# EAGLE board hvreg_feedback_2PS_ACDC (EAGLE 7.2.0)
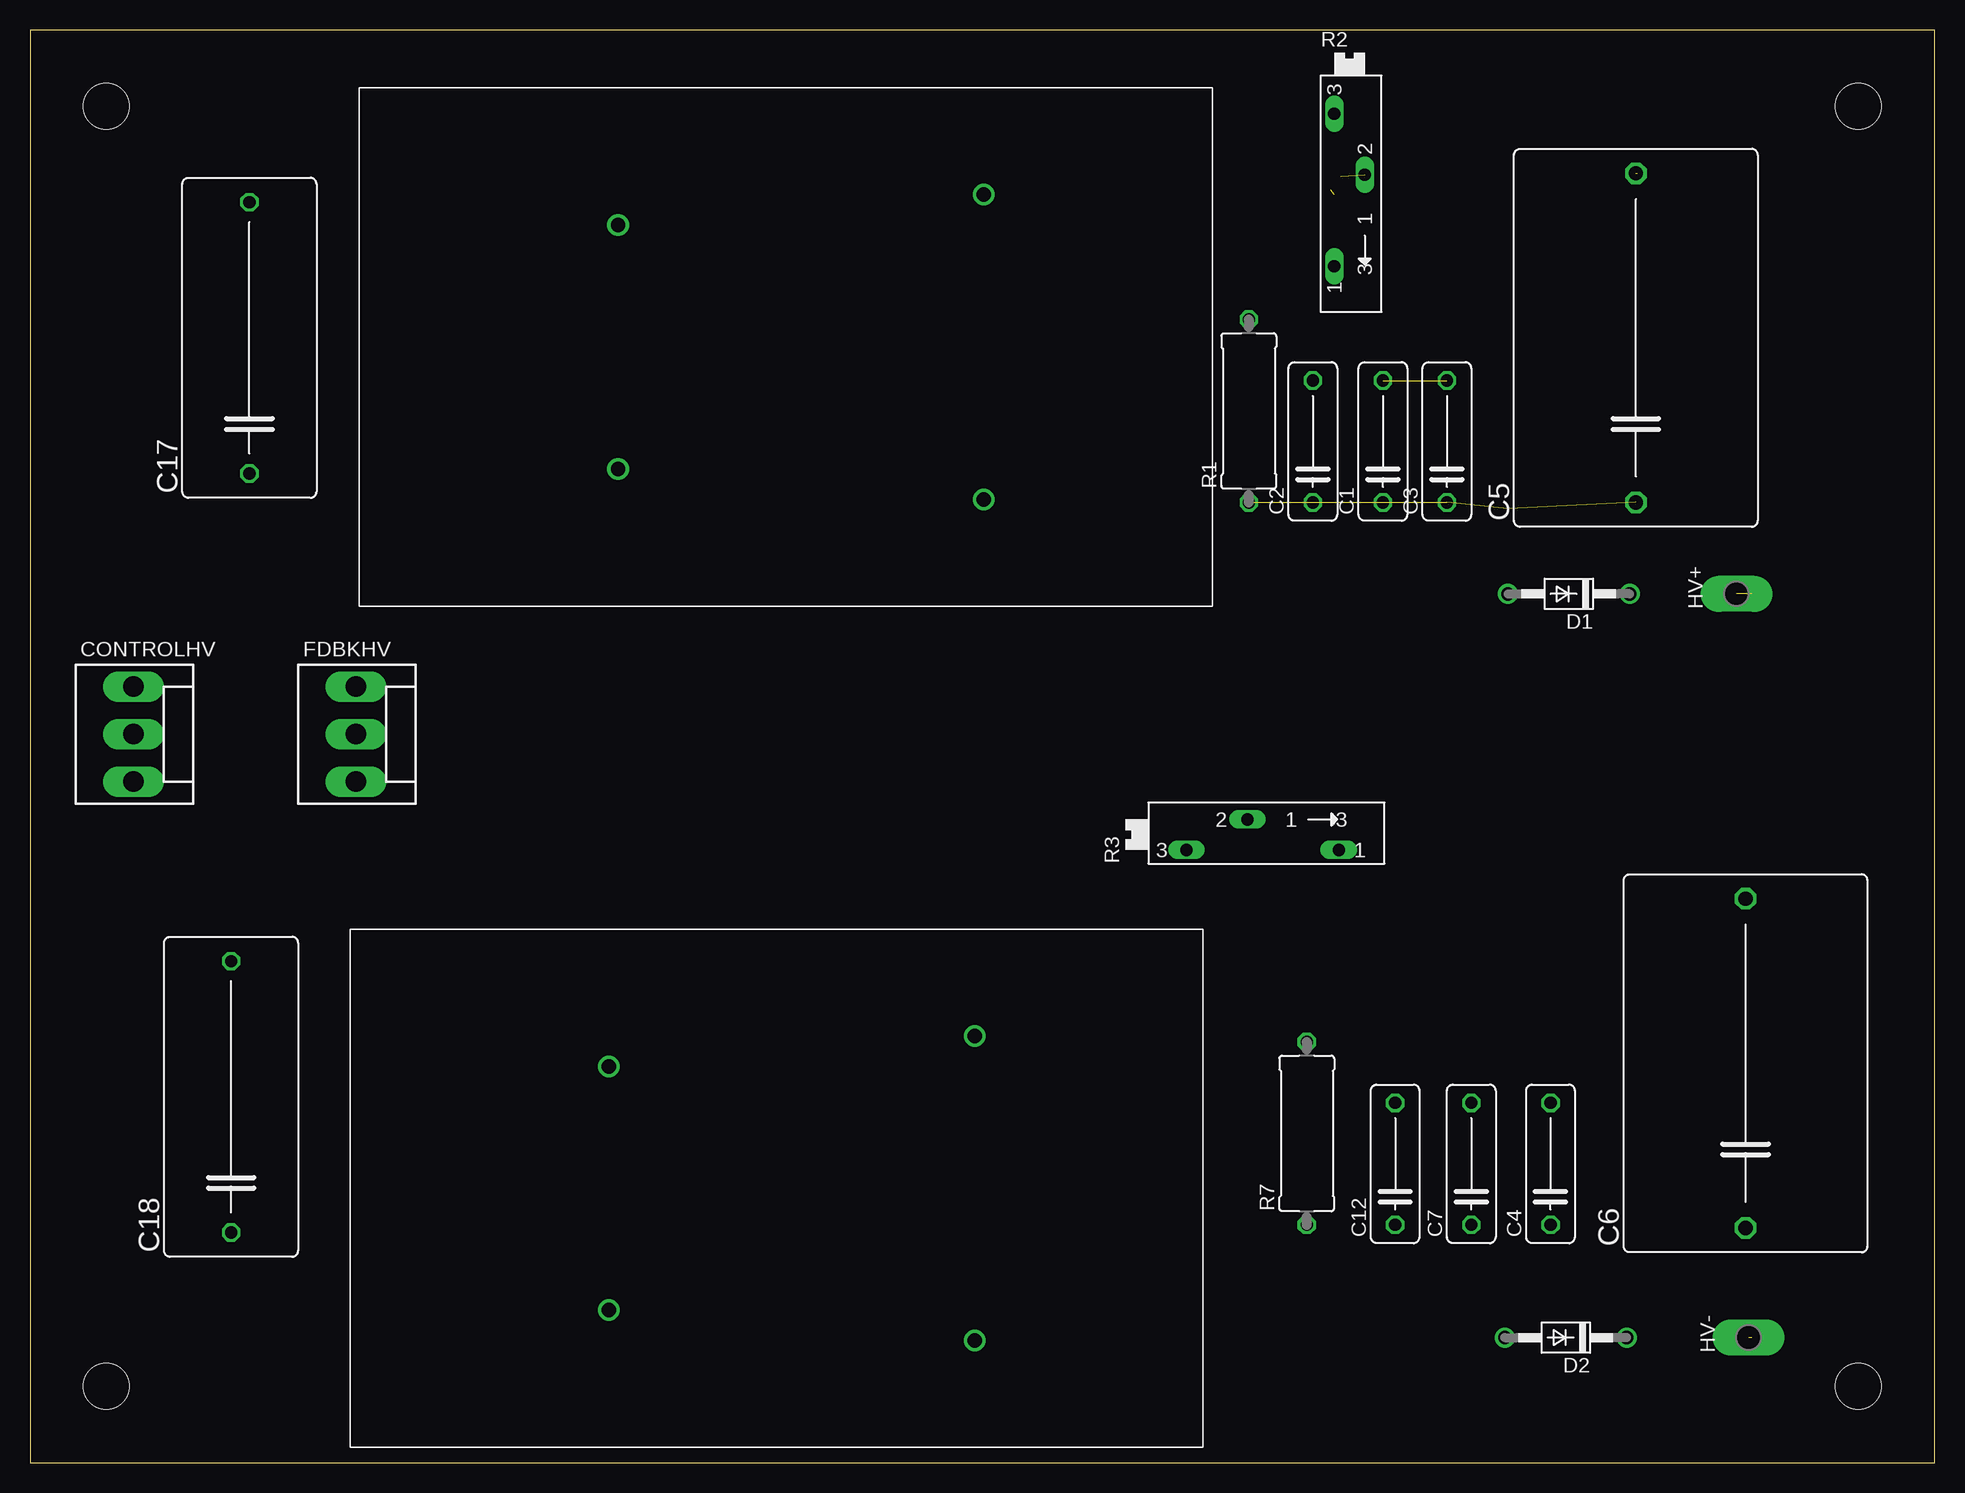
[diagram p0: board, top side]
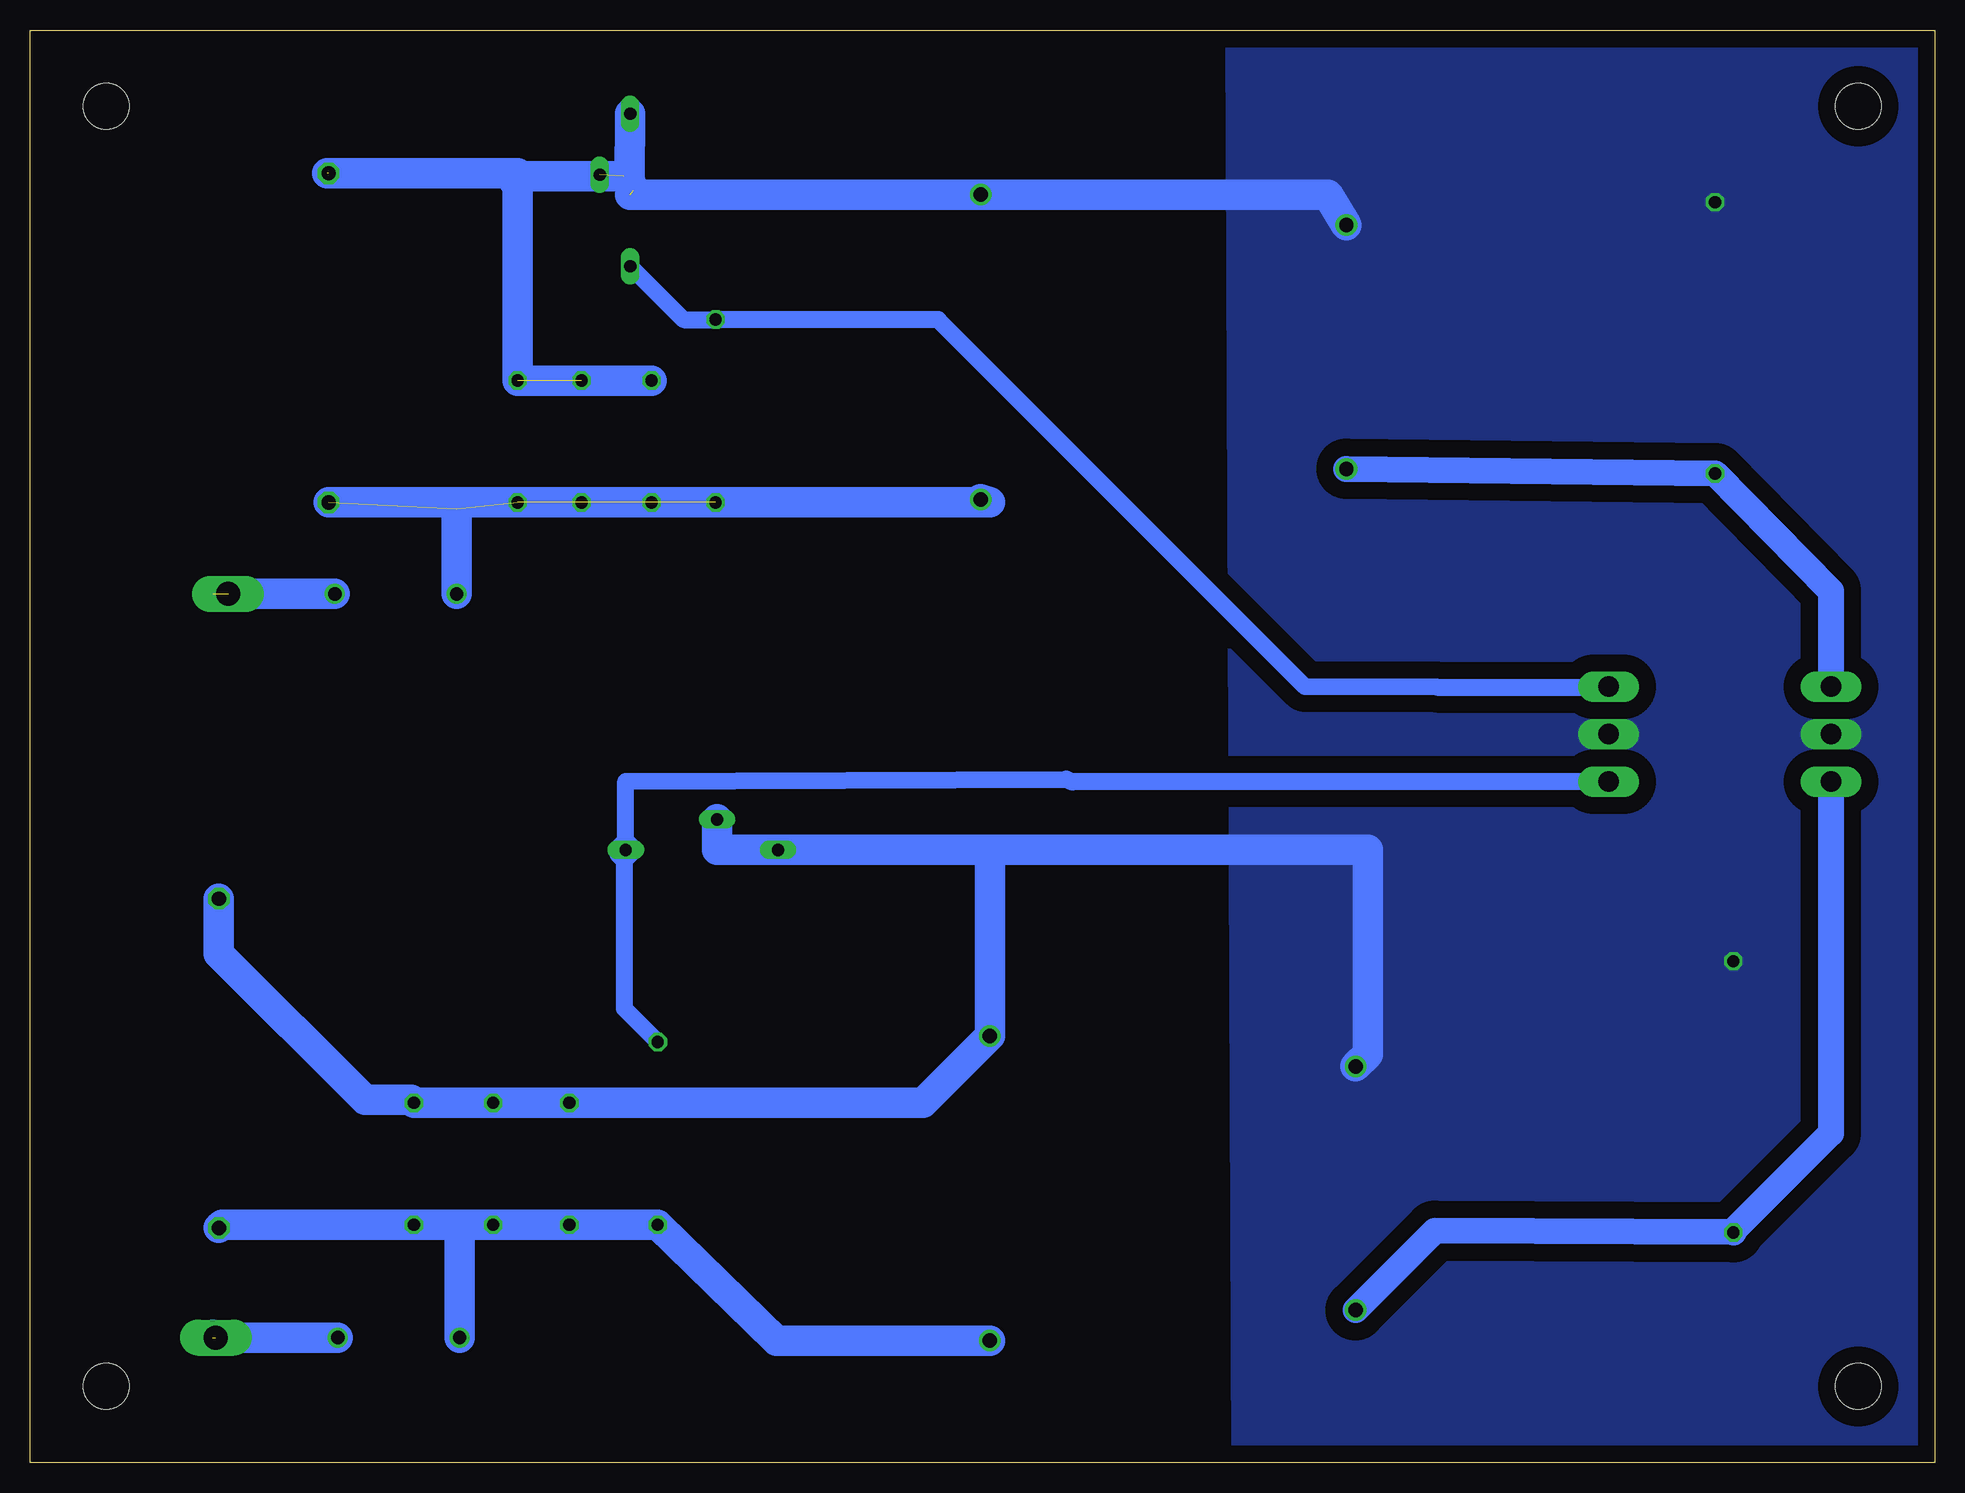
[diagram p1: board, bottom side, seen from below]

Size 158.75 x 119.38 mm. Coordinates in mm from the lower left corner, seen from the top.
Outline: 0,0 158.75,0 158.75,119.38 0,119.38 0,0
Copper layers (1*16): Top 0.035mm / dielectric 1.5mm / Bottom 0.035mm
Design rules "default": minimum track width 10mil, minimum drill 24mil, track to track 8mil, track to pad 8mil, pad to pad 8mil, via to via 8mil, smd to smd 8mil, copper to edge 40mil, drill to drill 8mil, minimum pad ring 10mil, minimum via ring 8mil, stop-mask expansion 4mil, vias tented up to drill 0mil, thermal gap 10mil
Holes 3.8 mm at 152.4,6.35 152.4,113.03 6.35,6.35 6.35,113.03

## Footprints (pad centres in the part's own frame; a part is rotated, then mirrored left to right if it is on the bottom)
C102-043X133 = drill 1.016 octagon: 1 -5.08,0; 2 5.08,0
C275-205X316 = drill 1.194 octagon: 1 -13.716,0; 2 13.716,0
C225-113X268 = drill 1.016 octagon: 1 -11.303,0; 2 11.303,0
KK-156-3 = drill 1.7 pad 2.184 long: 1 -3.96,0; 2 0,0; 3 3.96,0
DO41-10 = drill 1.118: A 5.08,0; C -5.08,0
P1-20Y = drill 2.007 pad 2.54 long: TP 0,0
P0613/15 = drill 1.016 octagon: 1 -7.62,0; 2 7.62,0
SP19L = drill 1.016 long: A 5.715,-1.27; E -6.985,-1.27; S -1.905,1.27
EMCO-F = drill 1.2: P$1 0,0; P$2 0,20.32; P$3 30.48,-2.54; P$4 30.48,22.86

## Placement (x,y rotation side)
C1  1n  [C102-043X133]  112.78,85.09 90 top
C2  10p  [C102-043X133]  106.93,85.09 90 top
C3  .01u  [C102-043X133]  118.11,85.09 90 top
C4  1n  [C102-043X133]  126.75,24.89 90 top
C5  1u  [C275-205X316]  133.86,93.73 90 top
C6  1u  [C275-205X316]  143,33.27 90 top
C7  10p  [C102-043X133]  120.14,24.89 90 top
C12  .01u  [C102-043X133]  113.79,24.89 90 top
C17  .1u  [C225-113X268]  18.29,93.73 90 top
C18  .1u  [C225-113X268]  16.76,30.48 90 top
CONTROLHV  [KK-156-3]  8.64,60.71 270 top
D1  1N4004  [DO41-10]  128.27,72.39 180 top
D2  1N4004  [DO41-10]  128.02,10.41 180 top
FDBKHV  [KK-156-3]  27.18,60.71 270 top
HV+  TPPAD1-20Y  [P1-20Y]  142.24,72.39 90 top
HV-  TPPAD1-20Y  [P1-20Y]  143.26,10.41 90 top
R1  2M  [P0613/15]  101.6,87.63 90 top
R2  [SP19L]  109.98,105.41 270 top
R3  [SP19L]  103.38,52.32 0 top
R7  2M  [P0613/15]  106.43,27.43 90 top
U$1  EMCO-F104PIN  [EMCO-F]  49.02,82.8 0 top
U$2  EMCO-F104PIN  [EMCO-F]  48.26,12.7 0 top

## Library data of the parts
C1-C7 C12 C17 C18 = rcl
CONTROLHV FDBKHV = con-molex; OC_FARNELL: unknown; OC_NEWARK: unknown
D1 D2 = diode
HV+ HV- = testpad
R1 R7 = resistor
R2 R3 = pot
U$1 U$2 = dc-dc-converter

## Nets
GND: C1.2 C2.2 C3.2 C4.2 C5.2 C6.2 C7.2 C12.2 C17.2 C18.2 CONTROLHV.2 FDBKHV.2 R2.E R2.S R3.E R3.S U$1.P$2 U$1.P$4 U$2.P$2 U$2.P$4
N$1: C1.1 C2.1 C3.1 C5.1 D1.A R1.1 U$1.P$3
N$2: C4.1 C6.1 C7.1 C12.1 D2.A R7.1 U$2.P$3
N$3: FDBKHV.1 R1.2 R2.A
N$4: D2.C HV-.TP
N$6: D1.C HV+.TP
N$8: FDBKHV.3 R3.A R7.2
N$13: C17.1 CONTROLHV.1 U$1.P$1
N$15: C18.1 CONTROLHV.3 U$2.P$1

## Tracks (layer width: path | path; a pad name or v marks a point on that pad's centre or on a via)
GND  (4 unrouted)
  Bottom 2.54: U$1.P$2 50.55,105.66 U$1.P$4 108.71,105.66 | 118.11,106.93 C3.2 C2.2 | 133.98,107.44 118.11,107.44 118.11,107.19 | 108.46,106.05 108.76,106.95 | 108.76,106.95 R2.E | 118.11,107.19 118.11,106.93 | 118.11,106.93 118.36,106.68 118.36,106.93 118.11,107.19 | 118.11,107.19 109.29,107.19 108.76,106.95 | R3.S 101.47,51.05 R3.E 78.74,51.05 | 78.74,51.05 47.24,51.05 47.24,34.04 U$2.P$2 | 78.74,51.05 U$2.P$4 84.33,29.97 C12.2 C7.2 C4.2 127,30.23 130.81,30.23 143,42.42 C6.2
  pour Bottom (isolate 1.422, no thermals): 0,119.38 58.93,119.13 58.42,0.25 0.25,0
N$1  (5 unrouted)
  Bottom 2.54: C5.1 78.74,80.01 U$1.P$3 | D1.A 123.19,79.5
N$2
  Bottom 2.54: U$2.P$3 96.52,10.16 R7.1 C12.1 C7.1 122.17,19.81 | 122.17,19.81 C4.1 142.75,19.81 C6.1 | D2.A 122.94,19.05 122.17,19.81
N$3
  Bottom 1.422: R2.A 104.27,95.25 R1.2 83.06,95.25 52.47,64.67 41.5,64.61 27.23,64.61 FDBKHV.1
N$4  (1 unrouted)
  Bottom 2.54: D2.C 143.51,10.41 143.51,10.67
N$6  (1 unrouted)
  Bottom 2.54: D1.C 143.51,72.39
N$8
  Bottom 1.422: R3.A 109.09,56.77 72.39,56.95 | 72.39,56.95 71.83,56.69 | FDBKHV.3 71.83,56.75 72.39,56.95 | 109.22,50.93 109.22,37.85 R7.2
  Bottom 2.54: 109.22,50.93 R3.A
N$13
  Bottom 2.184: U$1.P$1 C17.1 8.64,72.64 CONTROLHV.1
N$15
  Bottom 2.184: CONTROLHV.3 8.64,27.43 16.76,19.3 C18.1 41.66,19.3 U$2.P$1